# Altium PCB PCB.PcbDoc (part 2 of 2)
Units mm, origin at the board's own origin, x right, y up, seen from the top; angles counter-clockwise.
Board outline 21 x 43 mm, 2 copper layers (Top Layer, Bottom Layer), stack 1.671 mm thick; 34 components, 43 nets, 166 pads, 90 vias.
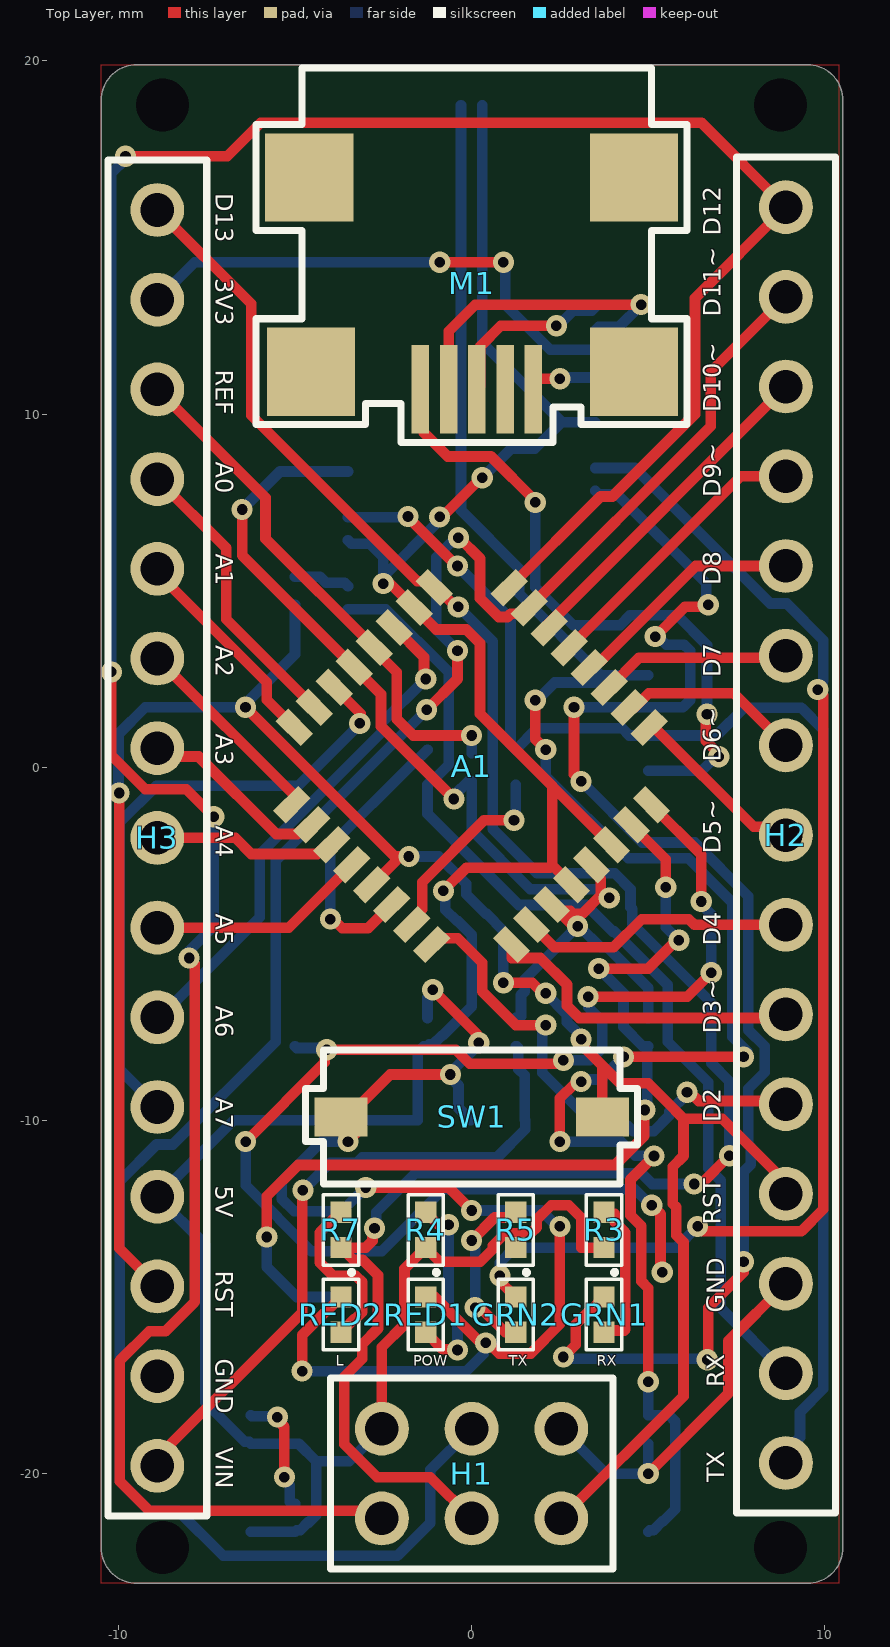
[diagram p0: Top Layer view]

## Via types
v1: diameter 0.6, hole 0.3, Top Layer to Bottom Layer, 90 vias

## Nets (pads, with @x,y where several pads share a name; then routed paths per layer and width w, separated by ;. In a path a pad name is that pad's centre, name@x,y a point inside that pad or via, vN(x,y) a via of type N, cw(c..) or ccw(c..) an arc to the next point about the centre after c; other vN are vias at no path point) (continued)
NetA1_8: (continued)
  Top Layer w0.3: v1(-6.4,-10.6) -4.157,-8.357 -4.157,-8.057 v1(-4.1,-8) -0.451,-8 -0.051,-8.4 2.419,-8.4 2.519,-8.3 v1(2.6,-8.3) ; v1(3.3,-6.5) 6.106,-6.5 v1(6.788,-5.818) ; A1.8 6.5,-2.469 v1(6.5,-3.8) ; v1(5.1,-12.4) 5.35,-12.65 5.35,-14.25 v1(5.4,-14.3)
  Bottom Layer w0.3: v1(-6.4,-10.6) -6.4,-11.836 -4.536,-13.7 -2.549,-13.7 -0.799,-11.95 4.624,-11.95 5.074,-12.4 v1(5.1,-12.4) ; C3.1 -4.95,-7.95 -4.15,-7.95 v1(-4.1,-8) ; v1(2.6,-8.3) 3.349,-8.3 3.7,-7.949 3.7,-7.2 3.3,-6.8 v1(3.3,-6.5) ; v1(6.5,-3.8) 6.5,-3.881 6.788,-4.169 v1(6.788,-5.818)
NetA1_30: A1.30 R2.2 | length 8.1
  Top Layer w0.3: v1(-4,-4.3) -3.919,-4.3 -3.658,-4.561 -2.934,-4.561 A1.30
  Bottom Layer w0.3: v1(-4,-4.3) -4,-2.226 -1.674,0.1 -1.65,0.1 R2.2
NetA1_31: A1.31 R1.1 | length 5.7
  Top Layer w0.3: A1.31 -1.697,-4.313 -1.4,-4.016 -1.4,-3.251 0.35,-1.501 1.199,-1.501 v1(1.2,-1.5)
  Bottom Layer w0.3: v1(1.2,-1.5) 1.25,-1.45 R1.1
NetC4_2: C4.2 U2.2 | length 1.6
  Bottom Layer w0.3: C4.2 -4.299,5.4 -4.124,5.225 -3.6,5.225 U2.2
NetF1_1: F1.1 M1.1 | length 18.9
  Top Layer w0.3: M1.1 -1.35,10.6 -1.35,9.476 -0.674,8.8 0.549,8.8 1.8,7.549 v1(1.8,7.5) ; v1(6.666,1.5) 6.631,1.465 6.631,0.75 7,0.381 v1(7,0.3)
  Bottom Layer w0.3: v1(1.8,7.5) 1.8,5.101 2.876,4.025 4.211,4.025 4.486,4.3 5.821,4.3 6.666,3.455 v1(6.666,1.5) ; F1.1 6.519,-0.1 6.919,0.3 v1(7,0.3)
NetGRN1_1: GRN1.1 U2.23 | length 41.3
  Top Layer w0.3: v1(2.6,-16.7) 2.95,-16.35 2.95,-15.776 3.326,-15.4 3.35,-15.4 GRN1.1 ; v1(2.9,1.7) 2.9,-0.2 v1(3.1,-0.4) ; v1(5.2,3.7) 6.043,4.543 6.643,4.543 v1(6.7,4.6) ; v1(6.673,-16.779) 6.7,-16.751 6.7,-15.3 7.7,-14.3 v1(7.7,-14)
  Bottom Layer w0.3: v1(2.6,-16.7) 2.65,-16.75 6.644,-16.75 v1(6.673,-16.779) ; v1(2.9,1.7) 5.984,1.7 6.19,1.906 6.19,3.294 6.014,3.47 5.511,3.47 5.281,3.7 v1(5.2,3.7) ; v1(3.1,-0.4) 4.831,-2.131 6.316,-2.131 7.838,-3.653 7.838,-7.44 8.3,-7.902 8.3,-8.638 7.838,-9.1 7.838,-10.689 7.9,-10.751 7.9,-11.249 7.7,-11.449 v1(7.7,-14) ; U2.23 3.6,7.725 4.124,7.725 6.643,5.207 6.643,4.657 v1(6.7,4.6)
NetGRN1_2: GRN1.2 R3.1 | length 4.3
  Top Layer w0.3: GRN1.2 3.8,-15.95 4.319,-15.95 4.35,-15.919 4.35,-14.435 4.35,-14.024 4.35,-13.176 4.05,-12.876 4.05,-12.65 3.8,-12.65 R3.1
NetGRN2_1: GRN2.1 U2.22 | length 35.8
  Top Layer w0.3: v1(0.8,-14.4) 0.8,-14.55 GRN2.1 ; v1(6.4,-13) 6.542,-13.142 9.34,-13.142 9.962,-12.52 9.962,2.038 v1(9.8,2.2)
  Bottom Layer w0.3: v1(0.8,-14.4) 0.8,-14.026 1.226,-13.6 5.8,-13.6 v1(6.4,-13) ; U2.22 4.623,8.475 8.46,4.638 8.924,4.638 9.962,3.6 9.962,2.443 9.8,2.281 v1(9.8,2.2)
NetGRN2_2: GRN2.2 R5.2 | length 5
  Top Layer w0.3: v1(0,-13.4) 0.65,-12.75 1.1,-12.75 R5.2 ; v1(0.1,-15.3) 0.248,-15.3 0.949,-16 GRN2.2
  Bottom Layer w0.3: v1(0,-13.4) 0.1,-13.5 v1(0.1,-15.3)
NetR4_1: R4.1 RED1.2 | length 5.5
  Top Layer w0.3: RED1.2 -0.822,-16.478 -0.422,-16.478 v1(-0.4,-16.5) ; R4.1 -0.957,-12.943 -0.668,-12.943 v1(-0.655,-12.955)
  Bottom Layer w0.3: v1(-0.655,-12.955) -0.655,-15.393 -0.4,-15.649 v1(-0.4,-16.5)
NetR7_1: R7.1 RED2.2 | length 4.8
  Top Layer w0.3: RED2.2 -3.336,-15.636 -3.312,-15.636 -3.1,-15.424 -3.1,-14.576 -3.276,-14.4 -3.924,-14.4 -4.3,-14.024 -4.3,-13.176 -3.874,-12.75 -3.85,-12.75 R7.1
RST: A1.29 C4.1 H1.5 H2.4 H3.13 R6.1 SW1.2 | length 61.6
  Top Layer w0.3: v1(-9.98,-0.73) -9.98,-13.62 H3.13 ; v1(-6.402,1.7) -2.176,-2.526 v1(-1.774,-2.526) ; A1.29 -2.817,-3.323 -2.151,-2.657 ; v1(0.9,-6.1) 1.719,-6.1 2.019,-6.4 v1(2.1,-6.4) ; H1.5 6,-17.81 6,-13.449 5.8,-13.249 5.8,-12.464 5.7,-12.364 5.7,-11.308 6,-11.008 6,-9.951 ; v1(3.1,-7.7) 3.1,-7.849 4.204,-8.952 5.004,-8.952 5.507,-9.456 5.507,-9.458 6,-9.951 ; SW1.2 3.7,-8.436 ; H2.4 8.9,-11.751 7.1,-9.951 6,-9.951
  Bottom Layer w0.3: v1(-9.98,-0.73) -9.98,-0.747 -10.034,-0.8 -10.067,-0.767 -10.067,-0.565 -10,-0.499 -10,0.942 -9.242,1.7 v1(-6.402,1.7) -6.402,1.798 -5,3.2 C4.1 ; v1(-1.774,-2.526) -0.926,-2.526 -0.15,-3.301 -0.15,-3.6 0.4,-4.15 0.424,-4.15 0.9,-4.626 v1(0.9,-6.1) ; v1(2.1,-6.4) 2.7,-7 2.7,-7.219 3.1,-7.619 v1(3.1,-7.7)
USBDM: M1.2 U2.16 | length 9
  Top Layer w0.3: M1.2 -0.65,12.35 0.1,13.1 v1(4.8,13.1)
  Bottom Layer w0.3: U2.16 3.6,12.475 4.175,12.475 v1(4.8,13.1)
USBDP: M1.3 U2.15 | length 5
  Top Layer w0.3: M1.3 0.25,10.8 0.25,11.924 0.826,12.5 v1(2.4,12.5)
  Bottom Layer w0.3: v1(2.4,12.5) 2.451,12.5 2.876,12.925 3.4,12.925 U2.15
VIN: C5.2 H3.15 U1.1 | length 19
  Top Layer w0.3: H3.15 -8.9,-19.539 -4.8,-15.439 -4.8,-12 v1(-4.776,-11.976)
  Bottom Layer w0.3: v1(-4.776,-11.976) -4,-11.2 -3.251,-11.2 -3.101,-11.05 0.72,-11.05 1.52,-10.25 U1.1 1.5,-9.98 1.5,-8.725 1.325,-8.55 1.325,-7.95 1.275,-7.9 C5.2
VUSB: C11.2 C12.2 D1.2 F1.2 | length 56.8
  Top Layer w0.3: v1(1.8,1.9) 1.8,0.8 v1(2.1,0.5) ; v1(2.5,-10.6) 2.5,-9.376 2.918,-8.957 3.043,-8.957 v1(3.1,-8.9) ; v1(4.3,-8.2) v1(7.7,-8.2) ; v1(5,-17.4) 5,-14.749 4.8,-14.549 4.8,-12.989 4.5,-12.689 4.5,-11.673 v1(5.166,-11.007)
  Bottom Layer w0.3: D1.2 -0.3,7.274 1.35,5.624 1.35,4.91 3.66,2.6 ; v1(1.8,1.9) 1.851,1.9 2.351,2.4 3.46,2.4 3.66,2.6 ; v1(2.1,0.5) 2.101,0.499 2.101,-0.25 4.432,-2.581 6.129,-2.581 7.388,-3.839 7.388,-7.626 7.8,-8.038 7.8,-8.088 7.7,-8.188 v1(7.7,-8.2) ; v1(2.5,-10.6) 4.239,-10.6 4.639,-11 5.158,-11 v1(5.166,-11.007) ; v1(3.1,-8.9) 3.157,-8.843 3.657,-8.843 v1(4.3,-8.2) ; C12.2 5.05,-21.6 5.15,-21.6 5.4,-21.35 5.424,-21.35 5.768,-21.006 5.768,-18.526 5.592,-18.35 C11.2 v1(5,-17.4) ; F1.2 3.66,2.6
pads on no net: M1.4 M1.6 M1.7 M1.8 U2.3 U2.6 U2.8 U2.9 U2.10 U2.11 U2.12 U2.13 U2.14 U2.19 U2.24 U2.27 U2.28

## Polygon pours and split planes (outlines as drawn)
no net on Top Layer "NONET_L-01_P-001" (none, remove dead copper, pour order 0): -10.487,19.893 10.4,19.893 10.4,-23.107 -10.487,-23.107
GND on Top Layer "NONET_L-01_P-001" (solid, remove dead copper, pour order 1): 22.5,6.2
GND on Bottom Layer "NONET_L-01_P-001" (none, remove dead copper, pour order 2): -10.899,19.893 10.4,19.893 10.4,-23.107 -10.478,-23.107

## Silkscreen, mask and mechanical layers (free items; w line width, h text height)
Top Overlay:
  text "D13" at -7.25,16.25 h0.5 r270
  text "D12" at 7.05,15.05 h0.5 r90
  text "3V3" at -7.25,13.85 h0.5 r270
  text "D11~" at 7.05,12.75 h0.5 r90
  text "REF" at -7.25,11.25 h0.5 r270
  text "D10~" at 7.05,10.05 h0.5 r90
  text "A0" at -7.25,8.65 h0.5 r270
  text "D9~" at 7.05,7.65 h0.5 r90
  text "A1" at -7.25,6.05 h0.5 r270
  text "D8" at 7.05,5.15 h0.5 r90
  text "A2" at -7.25,3.45 h0.5 r270
  text "D7" at 7.05,2.55 h0.5 r90
  text "A3" at -7.25,0.95 h0.5 r270
  text "D6~" at 7.05,0.15 h0.5 r90
  text "A4" at -7.25,-1.65 h0.5 r270
  text "D5~" at 7.05,-2.45 h0.5 r90
  text "A5" at -7.25,-4.15 h0.5 r270
  text "D4" at 7.05,-5.05 h0.5 r90
  text "A6" at -7.25,-6.75 h0.5 r270
  text "D3~" at 7.05,-7.55 h0.5 r90
  text "A7" at -7.25,-9.35 h0.5 r270
  text "D2" at 7.05,-10.05 h0.5 r90
  text "5V" at -7.25,-11.85 h0.5 r270
  text "RST" at 7.05,-12.95 h0.5 r90
  text "RST" at -7.25,-14.25 h0.5 r270
  text "GND" at 7.15,-15.45 h0.5 r90
  text "GND" at -7.25,-16.75 h0.5 r270
  text "L" at -3.85,-16.95 h0.3
  text "POW" at -1.65,-16.95 h0.3
  text "TX" at 1.05,-16.95 h0.3
  text "RX" at 3.55,-16.95 h0.3
  text "RX" at 7.15,-17.55 h0.5 r90
  text "VIN" at -7.25,-19.25 h0.5 r270
  text "TX" at 7.15,-20.25 h0.5 r90
Board Outline:
  circle w0.006: c0.013,-1.607 r0.003
  lines w0.013: -10.487,-22.107 ccw(c-9.487,-22.107) -9.487,-23.107 9.513,-23.107 ccw(c9.513,-22.107) 10.513,-22.107 10.513,18.893 ccw(c9.513,18.893) 9.513,19.893 -9.487,19.893 ccw(c-9.487,18.893) -10.487,18.893 -10.487,-22.107